# Altium PCB AT32.PcbDoc (part 6 of 9)
Units mm, origin at the board's own origin, x right, y up, seen from the top; angles counter-clockwise.
Board outline 152.1 x 84.6 mm, 2 copper layers (Top Layer, Bottom Layer); 49 components, 58 nets, 223 pads, 0 vias.
Unrouted connection lines stored in the file: 3.
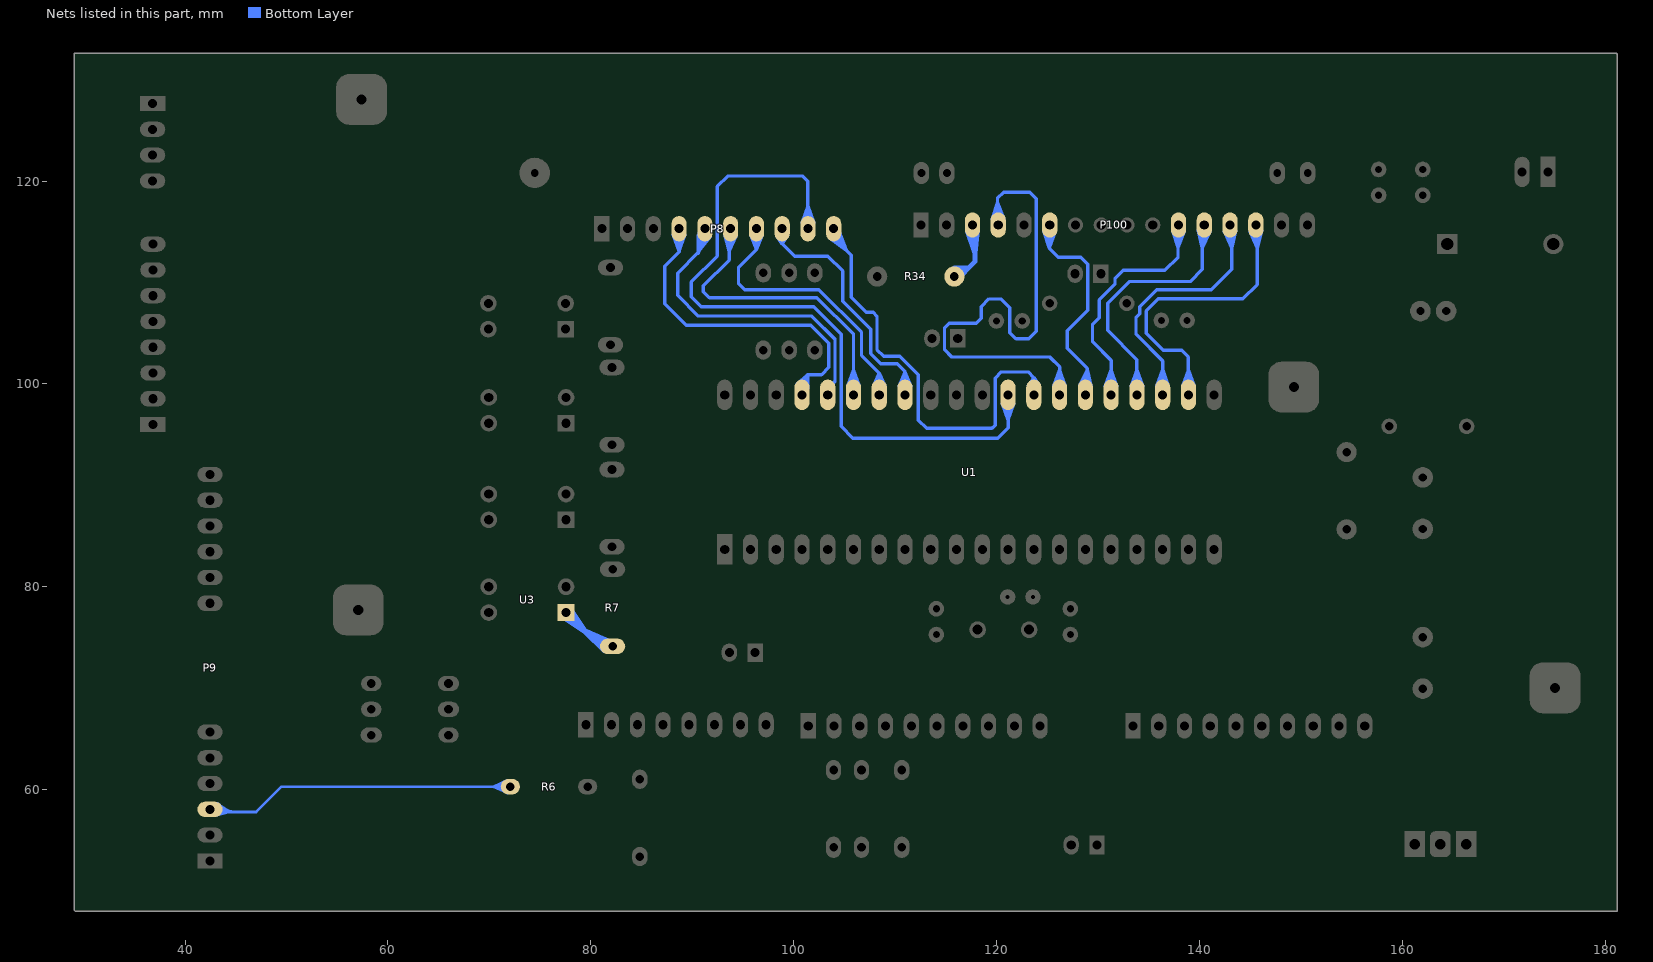
[diagram p6: the nets of this part, all layers, seen from the top]

## Nets (pads, with @x,y where several pads share a name; then routed paths per layer and width w, separated by ;. In a path a pad name is that pad's centre, name@x,y a point inside that pad or via, vN(x,y) a via of type N, cw(c..) or ccw(c..) an arc to the next point about the centre after c; other vN are vias at no path point) (continued)
NetP8_4: P8.4 U1.37 | length 145.6
  Bottom Layer w0.33: P8.4@88.297,114.396 cw(c87.299,113.398) 88.711,113.398 cw(c90.123,113.398) P8.4@89.125,114.396 ; P8.4@88.711,115.31 88.711,113.05 87.28,111.619 87.28,107.92 89.4,105.8 101.7,105.8 103.48,104.02 103.48,101.648 102.757,100.925 101.379,100.925 ; U1.37@100.826,98.927 100.826,100.372 101.379,100.925 ; U1.37@101.034,99.825 cw(c101.556,100.196) 101.103,100.649 ; U1.37@101.303,100.016 cw(c101.879,100.425) 101.379,100.925 ; P8.4@88.134,114.712 88.711,113.07 ; P8.4@88.134,114.712 88.711,113.07 ; P8.4@88.134,114.712 88.711,113.07 ; P8.4@88.134,114.712 88.711,113.07 ; P8.4@88.134,114.712 88.711,113.07 ; P8.4@88.134,114.712 88.711,113.07 ; P8.4@88.134,114.712 88.711,113.07 ; P8.4@88.457,114.791 88.711,113.07 ; P8.4@88.457,114.791 88.711,113.07 ; P8.4@88.457,114.791 88.711,113.07 ; P8.4@88.457,114.791 88.711,113.07 ; P8.4@88.457,114.791 88.711,113.07 ; P8.4@88.457,114.791 88.711,113.07 ; P8.4@88.457,114.791 88.711,113.07 ; 88.711,113.07 P8.4@89.288,114.712 ; 88.711,113.07 P8.4@88.965,114.791 ; 88.711,113.07 P8.4@88.711,114.81 ; 88.711,113.07 P8.4@89.288,114.712 ; 88.711,113.07 P8.4@88.965,114.791 ; 88.711,113.07 P8.4@88.711,114.81 ; 88.711,113.07 P8.4@89.288,114.712 ; 88.711,113.07 P8.4@88.965,114.791 ; 88.711,113.07 P8.4@88.711,114.81 ; 88.711,113.07 P8.4@89.288,114.712 ; 88.711,113.07 P8.4@88.965,114.791 ; 88.711,113.07 P8.4@88.711,114.81 ; 88.711,113.07 P8.4@89.288,114.712 ; 88.711,113.07 P8.4@88.965,114.791 ; 88.711,113.07 P8.4@88.711,114.81 ; 88.711,113.07 P8.4@89.288,114.712 ; 88.711,113.07 P8.4@88.965,114.791 ; 88.711,113.07 P8.4@88.711,114.81 ; 88.711,113.07 P8.4@89.288,114.712 ; 88.711,113.07 P8.4@88.965,114.791 ; 88.711,113.07 P8.4@88.711,114.81 ; U1.37@100.354,100.023 101.379,100.925 ; U1.37@100.354,100.023 101.379,100.925 ; U1.37@100.354,100.023 101.379,100.925 ; U1.37@100.354,100.023 101.379,100.925 ; U1.37@100.354,100.023 101.379,100.925 ; U1.37@100.354,100.023 101.379,100.925 ; U1.37@100.354,100.023 101.379,100.925 ; U1.37@100.604,99.802 101.379,100.925 ; U1.37@100.604,99.802 101.379,100.925 ; U1.37@100.604,99.802 101.379,100.925 ; U1.37@100.604,99.802 101.379,100.925 ; U1.37@100.604,99.802 101.379,100.925 ; U1.37@100.604,99.802 101.379,100.925 ; U1.37@100.604,99.802 101.379,100.925 ; U1.37@100.826,99.677 101.379,100.925 ; U1.37@100.826,99.677 101.379,100.925 ; U1.37@100.826,99.677 101.379,100.925 ; U1.37@100.826,99.677 101.379,100.925 ; U1.37@100.826,99.677 101.379,100.925 ; U1.37@100.826,99.677 101.379,100.925 ; U1.37@100.826,99.677 101.379,100.925 ; U1.37@101.068,99.596 101.379,100.925 ; U1.37@101.068,99.596 101.379,100.925 ; U1.37@101.068,99.596 101.379,100.925 ; U1.37@101.068,99.596 101.379,100.925 ; U1.37@101.068,99.596 101.379,100.925 ; U1.37@101.068,99.596 101.379,100.925 ; U1.37@101.068,99.596 101.379,100.925 ; 101.379,100.925 U1.37@101.399,99.56 ; 101.379,100.925 U1.37@101.399,99.56 ; 101.379,100.925 U1.37@101.399,99.56 ; 101.379,100.925 U1.37@101.399,99.56 ; 101.379,100.925 U1.37@101.399,99.56 ; 101.379,100.925 U1.37@101.399,99.56 ; 101.379,100.925 U1.37@101.399,99.56
NetP8_5: P8.5 U1.36 | length 102
  Bottom Layer w0.33: 90.6,112.868 cw(c92.159,112.868) P8.5@91.499,114.28 ; 90.6,113.386 cw(c91.917,113.386) P8.5@91.359,114.579 ; 90.6,113.905 cw(c91.674,113.905) P8.5@91.219,114.878 ; 90.6,114.423 cw(c91.432,114.423) P8.5@91.079,115.177 ; P8.5@90.676,114.916 90.628,113.053 ; P8.5@90.676,114.917 90.636,113.099 ; P8.5@90.677,114.921 90.623,113.104 ; P8.5@90.677,114.924 90.602,113.043 ; P8.5@91.251,115.31 90.6,114.659 90.6,112.98 88.56,110.94 88.56,108.74 90.6,106.7 101.8,106.7 104.081,104.419 104.081,100.265 103.366,99.55 U1.36@103.366,98.927 ; P8.5@91.484,114.705 90.623,113.104 ; P8.5@91.484,114.706 90.602,113.043 ; P8.5@91.485,114.709 90.628,113.053 ; P8.5@91.76,114.522 90.623,113.104 ; P8.5@91.762,114.525 90.602,113.043 ; P8.5@91.763,114.526 90.636,113.099 ; P8.5@91.765,114.531 90.628,113.053 ; 90.6,112.998 P8.5@91.765,114.531 ; 90.6,112.998 P8.5@90.677,114.922 ; 90.6,112.998 P8.5@91.485,114.708 ; 90.6,112.998 P8.5@91.006,114.88 ; 90.6,112.998 P8.5@91.251,114.81 ; 90.6,112.998 P8.5@91.765,114.531 ; 90.6,112.998 P8.5@90.677,114.922 ; 90.6,112.998 P8.5@91.485,114.708 ; 90.6,112.998 P8.5@91.006,114.88 ; 90.6,112.998 P8.5@91.251,114.81 ; 90.6,112.998 P8.5@91.765,114.531 ; 90.6,112.998 P8.5@90.677,114.922 ; 90.6,112.998 P8.5@91.485,114.708 ; 90.6,112.998 P8.5@91.006,114.88 ; 90.6,112.998 P8.5@91.251,114.81 ; 90.602,113.043 91.006,114.882 90.623,113.104 ; 90.602,113.043 P8.5@91.251,114.81 ; 90.623,113.104 P8.5@91.251,114.81 ; 90.628,113.053 91.005,114.879 90.636,113.099 ; 90.628,113.053 P8.5@91.251,114.81 ; 90.636,113.099 P8.5@91.484,114.707 ; 90.636,113.099 P8.5@91.251,114.81
NetP8_6: P8.6 U1.35 | length 157.3
  Bottom Layer w0.33: P8.6@93.377,114.396 cw(c92.743,113.762) 93.64,113.762 ; 93.64,113.033 cw(c95.568,113.033) P8.6@94.205,114.396 ; 93.64,113.83 cw(c94.771,113.83) P8.6@93.971,114.63 ; P8.6@93.791,115.31 93.64,115.159 93.64,112.22 91.1,109.68 91.1,109.1 91.7,108.5 102.3,108.5 105.906,104.894 U1.35@105.906,98.927 ; P8.6@94.357,114.663 93.64,113.072 ; U1.35@105.492,100.091 ccw(c104.494,101.089) 105.906,101.089 ccw(c107.318,101.089) U1.35@106.32,100.091 ; P8.6@93.208,114.762 93.64,113.066 ; P8.6@93.208,114.762 93.64,113.066 ; P8.6@93.208,114.762 93.64,113.066 ; P8.6@93.208,114.762 93.64,113.066 ; P8.6@93.208,114.762 93.64,113.066 ; P8.6@93.208,114.762 93.64,113.066 ; P8.6@93.208,114.762 93.64,113.072 ; P8.6@93.536,114.813 93.64,113.066 ; P8.6@93.536,114.813 93.64,113.066 ; P8.6@93.536,114.813 93.64,113.066 ; P8.6@93.536,114.813 93.64,113.066 ; P8.6@93.536,114.813 93.64,113.066 ; P8.6@93.536,114.813 93.64,113.066 ; P8.6@93.536,114.813 93.64,113.072 ; 93.64,113.066 P8.6@94.357,114.663 ; 93.64,113.066 P8.6@94.043,114.77 ; 93.64,113.066 P8.6@93.791,114.81 ; 93.64,113.066 P8.6@94.357,114.663 ; 93.64,113.066 P8.6@94.043,114.77 ; 93.64,113.066 P8.6@93.791,114.81 ; 93.64,113.066 P8.6@94.357,114.663 ; 93.64,113.066 P8.6@94.043,114.77 ; 93.64,113.066 P8.6@93.791,114.81 ; 93.64,113.066 P8.6@94.357,114.663 ; 93.64,113.066 P8.6@94.043,114.77 ; 93.64,113.066 P8.6@93.791,114.81 ; 93.64,113.066 P8.6@94.357,114.663 ; 93.64,113.066 P8.6@94.043,114.77 ; 93.64,113.066 P8.6@93.791,114.81 ; 93.64,113.066 P8.6@94.357,114.663 ; 93.64,113.066 P8.6@94.043,114.77 ; 93.64,113.066 P8.6@93.791,114.81 ; 93.64,113.072 P8.6@94.043,114.77 ; 93.64,113.072 P8.6@93.791,114.81 ; U1.35@105.329,99.775 105.906,101.417 ; U1.35@105.329,99.775 105.906,101.417 ; U1.35@105.329,99.775 105.906,101.417 ; U1.35@105.329,99.775 105.906,101.417 ; U1.35@105.329,99.775 105.906,101.417 ; U1.35@105.329,99.775 105.906,101.417 ; U1.35@105.329,99.775 105.906,101.417 ; U1.35@105.652,99.696 105.906,101.417 ; U1.35@105.652,99.696 105.906,101.417 ; U1.35@105.652,99.696 105.906,101.417 ; U1.35@105.652,99.696 105.906,101.417 ; U1.35@105.652,99.696 105.906,101.417 ; U1.35@105.652,99.696 105.906,101.417 ; U1.35@105.652,99.696 105.906,101.417 ; U1.35@105.906,99.677 105.906,101.417 ; U1.35@105.906,99.677 105.906,101.417 ; U1.35@105.906,99.677 105.906,101.417 ; U1.35@105.906,99.677 105.906,101.417 ; U1.35@105.906,99.677 105.906,101.417 ; U1.35@105.906,99.677 105.906,101.417 ; U1.35@105.906,99.677 105.906,101.417 ; 105.906,101.417 U1.35@106.483,99.775 ; 105.906,101.417 U1.35@106.16,99.696 ; 105.906,101.417 U1.35@106.483,99.775 ; 105.906,101.417 U1.35@106.16,99.696 ; 105.906,101.417 U1.35@106.483,99.775 ; 105.906,101.417 U1.35@106.16,99.696 ; 105.906,101.417 U1.35@106.483,99.775 ; 105.906,101.417 U1.35@106.16,99.696 ; 105.906,101.417 U1.35@106.483,99.775 ; 105.906,101.417 U1.35@106.16,99.696 ; 105.906,101.417 U1.35@106.483,99.775 ; 105.906,101.417 U1.35@106.16,99.696 ; 105.906,101.417 U1.35@106.483,99.775 ; 105.906,101.417 U1.35@106.16,99.696
NetP8_7: P8.7 U1.34 | length 134.9
  Bottom Layer w0.33: P8.7@95.917,114.396 cw(c94.919,113.398) 96.331,113.398 cw(c97.743,113.398) P8.7@96.745,114.396 ; P8.7@96.331,115.31 96.331,113.231 ; U1.34@108.04,100.098 ccw(c107.118,101.054) 108.446,101.054 ; U1.34@108.446,98.927 108.446,101.054 ; U1.34@108.852,100.098 cw(c109.774,101.054) 108.446,101.054 ; P8.7@95.756,114.702 96.331,113.231 ; P8.7@95.756,114.702 96.331,113.231 ; P8.7@95.756,114.702 96.331,113.231 ; P8.7@95.756,114.702 96.331,113.231 ; P8.7@95.756,114.702 96.331,113.231 ; P8.7@95.756,114.702 96.331,113.231 ; P8.7@95.756,114.702 96.331,113.231 ; P8.7@96.077,114.789 96.331,113.231 ; P8.7@96.077,114.789 96.331,113.231 ; P8.7@96.077,114.789 96.331,113.231 ; P8.7@96.077,114.789 96.331,113.231 ; P8.7@96.077,114.789 96.331,113.231 ; P8.7@96.077,114.789 96.331,113.231 ; P8.7@96.077,114.789 96.331,113.231 ; 96.331,113.231 94.56,111.46 94.56,109.94 95.2,109.3 102.48,109.3 106.7,105.08 106.7,102.8 108.446,101.054 ; 96.331,113.231 P8.7@96.906,114.702 ; 96.331,113.231 P8.7@96.585,114.789 ; 96.331,113.231 P8.7@96.331,114.81 ; 96.331,113.231 P8.7@96.906,114.702 ; 96.331,113.231 P8.7@96.585,114.789 ; 96.331,113.231 P8.7@96.331,114.81 ; 96.331,113.231 P8.7@96.906,114.702 ; 96.331,113.231 P8.7@96.585,114.789 ; 96.331,113.231 P8.7@96.331,114.81 ; 96.331,113.231 P8.7@96.906,114.702 ; 96.331,113.231 P8.7@96.585,114.789 ; 96.331,113.231 P8.7@96.331,114.81 ; 96.331,113.231 P8.7@96.906,114.702 ; 96.331,113.231 P8.7@96.585,114.789 ; 96.331,113.231 P8.7@96.331,114.81 ; 96.331,113.231 P8.7@96.906,114.702 ; 96.331,113.231 P8.7@96.585,114.789 ; 96.331,113.231 P8.7@96.331,114.81 ; 96.331,113.231 P8.7@96.906,114.702 ; 96.331,113.231 P8.7@96.585,114.789 ; 96.331,113.231 P8.7@96.331,114.81 ; U1.34@107.874,99.801 108.446,101.054 ; U1.34@107.874,99.801 108.446,101.054 ; U1.34@107.874,99.801 108.446,101.054 ; U1.34@107.874,99.801 108.446,101.054 ; U1.34@107.874,99.801 108.446,101.054 ; U1.34@107.874,99.801 108.446,101.054 ; U1.34@107.874,99.801 108.446,101.054 ; U1.34@108.192,99.701 108.446,101.054 ; U1.34@108.192,99.701 108.446,101.054 ; U1.34@108.192,99.701 108.446,101.054 ; U1.34@108.192,99.701 108.446,101.054 ; U1.34@108.192,99.701 108.446,101.054 ; U1.34@108.192,99.701 108.446,101.054 ; U1.34@108.192,99.701 108.446,101.054 ; U1.34@108.446,99.677 108.446,101.054 ; U1.34@108.446,99.677 108.446,101.054 ; U1.34@108.446,99.677 108.446,101.054 ; U1.34@108.446,99.677 108.446,101.054 ; U1.34@108.446,99.677 108.446,101.054 ; U1.34@108.446,99.677 108.446,101.054 ; U1.34@108.446,99.677 108.446,101.054 ; 108.446,101.054 U1.34@109.018,99.801 ; 108.446,101.054 U1.34@108.7,99.701 ; 108.446,101.054 U1.34@109.018,99.801 ; 108.446,101.054 U1.34@108.7,99.701 ; 108.446,101.054 U1.34@109.018,99.801 ; 108.446,101.054 U1.34@108.7,99.701 ; 108.446,101.054 U1.34@109.018,99.801 ; 108.446,101.054 U1.34@108.7,99.701 ; 108.446,101.054 U1.34@109.018,99.801 ; 108.446,101.054 U1.34@108.7,99.701 ; 108.446,101.054 U1.34@109.018,99.801 ; 108.446,101.054 U1.34@108.7,99.701 ; 108.446,101.054 U1.34@109.018,99.801 ; 108.446,101.054 U1.34@108.7,99.701
NetP8_8: P8.8 U1.33 | length 116.1
  Bottom Layer w0.33: P8.8@98.593,114.295 cw(c98.341,113.829) 98.871,113.829 ; P8.8@98.871,115.31 98.871,113.829 ; P8.8@99.149,114.295 ccw(c99.401,113.829) 98.871,113.829 ; U1.33@110.572,100.091 ccw(c109.574,101.089) 110.986,101.089 ccw(c112.398,101.089) U1.33@111.4,100.091 ; U1.33@110.986,98.927 110.986,101.225 ; P8.8@98.313,114.636 98.871,113.829 ; P8.8@98.313,114.636 98.871,113.829 ; P8.8@98.313,114.636 98.871,113.829 ; P8.8@98.313,114.636 98.871,113.829 ; P8.8@98.313,114.636 98.871,113.829 ; P8.8@98.313,114.636 98.871,113.829 ; P8.8@98.313,114.636 98.871,113.829 ; P8.8@98.618,114.777 98.871,113.829 ; P8.8@98.618,114.777 98.871,113.829 ; P8.8@98.618,114.777 98.871,113.829 ; P8.8@98.618,114.777 98.871,113.829 ; P8.8@98.618,114.777 98.871,113.829 ; P8.8@98.618,114.777 98.871,113.829 ; P8.8@98.618,114.777 98.871,113.829 ; 98.871,113.829 100.1,112.6 103.38,112.6 104.84,111.14 104.84,108.14 107.6,105.38 107.6,103 108.6,102 110.211,102 110.986,101.225 ; 98.871,113.829 P8.8@99.429,114.636 ; 98.871,113.829 P8.8@99.124,114.777 ; 98.871,113.829 P8.8@98.871,114.81 ; 98.871,113.829 P8.8@99.429,114.636 ; 98.871,113.829 P8.8@99.124,114.777 ; 98.871,113.829 P8.8@98.871,114.81 ; 98.871,113.829 P8.8@99.429,114.636 ; 98.871,113.829 P8.8@99.124,114.777 ; 98.871,113.829 P8.8@98.871,114.81 ; 98.871,113.829 P8.8@99.429,114.636 ; 98.871,113.829 P8.8@99.124,114.777 ; 98.871,113.829 P8.8@98.871,114.81 ; 98.871,113.829 P8.8@99.429,114.636 ; 98.871,113.829 P8.8@99.124,114.777 ; 98.871,113.829 P8.8@98.871,114.81 ; 98.871,113.829 P8.8@99.429,114.636 ; 98.871,113.829 P8.8@99.124,114.777 ; 98.871,113.829 P8.8@98.871,114.81 ; 98.871,113.829 P8.8@99.429,114.636 ; 98.871,113.829 P8.8@99.124,114.777 ; 98.871,113.829 P8.8@98.871,114.81 ; U1.33@110.412,99.788 110.986,101.225 ; U1.33@110.412,99.788 110.986,101.225 ; U1.33@110.412,99.788 110.986,101.225 ; U1.33@110.412,99.788 110.986,101.225 ; U1.33@110.412,99.788 110.986,101.225 ; U1.33@110.412,99.788 110.986,101.225 ; U1.33@110.412,99.788 110.986,101.225 ; U1.33@110.732,99.698 110.986,101.225 ; U1.33@110.732,99.698 110.986,101.225 ; U1.33@110.732,99.698 110.986,101.225 ; U1.33@110.732,99.698 110.986,101.225 ; U1.33@110.732,99.698 110.986,101.225 ; U1.33@110.732,99.698 110.986,101.225 ; U1.33@110.732,99.698 110.986,101.225 ; U1.33@110.986,99.677 110.986,101.225 ; U1.33@110.986,99.677 110.986,101.225 ; U1.33@110.986,99.677 110.986,101.225 ; U1.33@110.986,99.677 110.986,101.225 ; U1.33@110.986,99.677 110.986,101.225 ; U1.33@110.986,99.677 110.986,101.225 ; U1.33@110.986,99.677 110.986,101.225 ; 110.986,101.225 U1.33@111.56,99.788 ; 110.986,101.225 U1.33@111.24,99.698 ; 110.986,101.225 U1.33@111.56,99.788 ; 110.986,101.225 U1.33@111.24,99.698 ; 110.986,101.225 U1.33@111.56,99.788 ; 110.986,101.225 U1.33@111.24,99.698 ; 110.986,101.225 U1.33@111.56,99.788 ; 110.986,101.225 U1.33@111.24,99.698 ; 110.986,101.225 U1.33@111.56,99.788 ; 110.986,101.225 U1.33@111.24,99.698 ; 110.986,101.225 U1.33@111.56,99.788 ; 110.986,101.225 U1.33@111.24,99.698 ; 110.986,101.225 U1.33@111.56,99.788 ; 110.986,101.225 U1.33@111.24,99.698
NetP8_9: P8.9 U1.29 | length 198.4
  Bottom Layer w0.33: P8.9@100.997,116.224 ccw(c99.999,117.222) 101.411,117.222 ccw(c102.823,117.222) P8.9@101.825,116.224 ; P8.9@101.411,115.31 101.411,119.989 100.9,120.5 93.5,120.5 92.471,119.471 92.471,116.022 92.476,116.017 92.476,114.603 92.471,114.598 92.471,112.611 89.92,110.06 89.92,108.58 90.9,107.6 102,107.6 104.681,104.919 104.681,99.582 ; 104.686,99.582 104.686,95.814 105.84,94.66 120.12,94.66 121.146,95.686 U1.29@121.146,98.927 ; U1.29@120.732,97.763 cw(c119.734,96.765) 121.146,96.765 cw(c122.558,96.765) U1.29@121.56,97.763 ; P8.9@100.834,115.908 101.411,117.55 ; P8.9@100.834,115.908 101.411,117.55 ; P8.9@100.834,115.908 101.411,117.55 ; P8.9@100.834,115.908 101.411,117.55 ; P8.9@100.834,115.908 101.411,117.55 ; P8.9@100.834,115.908 101.411,117.55 ; P8.9@100.834,115.908 101.411,117.55 ; P8.9@101.157,115.829 101.411,117.55 ; P8.9@101.157,115.829 101.411,117.55 ; P8.9@101.157,115.829 101.411,117.55 ; P8.9@101.157,115.829 101.411,117.55 ; P8.9@101.157,115.829 101.411,117.55 ; P8.9@101.157,115.829 101.411,117.55 ; P8.9@101.157,115.829 101.411,117.55 ; P8.9@101.411,115.81 101.411,117.55 ; P8.9@101.411,115.81 101.411,117.55 ; P8.9@101.411,115.81 101.411,117.55 ; P8.9@101.411,115.81 101.411,117.55 ; P8.9@101.411,115.81 101.411,117.55 ; P8.9@101.411,115.81 101.411,117.55 ; P8.9@101.411,115.81 101.411,117.55 ; 101.411,117.55 P8.9@101.988,115.908 ; 101.411,117.55 P8.9@101.665,115.829 ; 101.411,117.55 P8.9@101.988,115.908 ; 101.411,117.55 P8.9@101.665,115.829 ; 101.411,117.55 P8.9@101.988,115.908 ; 101.411,117.55 P8.9@101.665,115.829 ; 101.411,117.55 P8.9@101.988,115.908 ; 101.411,117.55 P8.9@101.665,115.829 ; 101.411,117.55 P8.9@101.988,115.908 ; 101.411,117.55 P8.9@101.665,115.829 ; 101.411,117.55 P8.9@101.988,115.908 ; 101.411,117.55 P8.9@101.665,115.829 ; 101.411,117.55 P8.9@101.988,115.908 ; 101.411,117.55 P8.9@101.665,115.829 ; U1.29@120.569,98.079 121.146,96.437 ; U1.29@120.569,98.079 121.146,96.437 ; U1.29@120.569,98.079 121.146,96.437 ; U1.29@120.569,98.079 121.146,96.437 ; U1.29@120.569,98.079 121.146,96.437 ; U1.29@120.569,98.079 121.146,96.437 ; U1.29@120.569,98.079 121.146,96.437 ; U1.29@120.892,98.158 121.146,96.437 ; U1.29@120.892,98.158 121.146,96.437 ; U1.29@120.892,98.158 121.146,96.437 ; U1.29@120.892,98.158 121.146,96.437 ; U1.29@120.892,98.158 121.146,96.437 ; U1.29@120.892,98.158 121.146,96.437 ; U1.29@120.892,98.158 121.146,96.437 ; 121.146,96.437 U1.29@121.723,98.079 ; 121.146,96.437 U1.29@121.4,98.158 ; 121.146,96.437 U1.29@121.146,98.177 ; 121.146,96.437 U1.29@121.723,98.079 ; 121.146,96.437 U1.29@121.4,98.158 ; 121.146,96.437 U1.29@121.146,98.177 ; 121.146,96.437 U1.29@121.723,98.079 ; 121.146,96.437 U1.29@121.4,98.158 ; 121.146,96.437 U1.29@121.146,98.177 ; 121.146,96.437 U1.29@121.723,98.079 ; 121.146,96.437 U1.29@121.4,98.158 ; 121.146,96.437 U1.29@121.146,98.177 ; 121.146,96.437 U1.29@121.723,98.079 ; 121.146,96.437 U1.29@121.4,98.158 ; 121.146,96.437 U1.29@121.146,98.177 ; 121.146,96.437 U1.29@121.723,98.079 ; 121.146,96.437 U1.29@121.4,98.158 ; 121.146,96.437 U1.29@121.146,98.177 ; 121.146,96.437 U1.29@121.723,98.079 ; 121.146,96.437 U1.29@121.4,98.158 ; 121.146,96.437 U1.29@121.146,98.177
NetP8_10: P8.10 U1.28 | length 154.8
  Bottom Layer w0.33: P8.10@103.543,114.39 105.204,113.185 ; P8.10@103.543,114.391 105.194,113.192 ; P8.10@103.544,114.389 105.189,113.207 ; P8.10@103.951,114.225 cw(c103.951,113.733) 104.299,114.081 ; P8.10@103.951,115.31 103.951,114.429 105.68,112.7 105.68,108.54 107.16,107.06 107.858,107.06 108.218,106.7 108.218,103.397 108.884,102.731 110.469,102.731 ; P8.10@104.162,114.953 105.204,113.185 ; P8.10@104.206,114.81 ccw(c105.742,114.81) 104.656,113.724 ; P8.10@104.46,115.098 105.204,113.185 ; P8.10@104.536,114.81 ccw(c106.868,114.81) 105.219,113.161 ; 112.301,100.8 112.301,96.439 113.12,95.62 119.56,95.62 119.88,95.94 119.88,100.582 120.481,101.183 123.138,101.183 123.686,100.635 ; U1.28@123.419,100.197 ccw(c123.194,100.635) 123.686,100.635 ; U1.28@123.686,98.927 123.686,100.635 ; U1.28@123.953,100.197 cw(c124.178,100.635) 123.686,100.635 ; P8.10@103.542,114.392 105.21,113.17 ; P8.10@103.542,114.392 105.21,113.17 ; P8.10@103.542,114.392 105.21,113.17 ; P8.10@103.542,114.392 105.21,113.17 ; P8.10@103.759,114.643 105.21,113.17 ; P8.10@103.759,114.643 105.21,113.17 ; P8.10@103.759,114.643 105.21,113.17 ; P8.10@103.759,114.643 105.21,113.17 ; P8.10@103.759,114.642 105.194,113.192 ; P8.10@103.951,114.81 105.21,113.17 ; P8.10@103.951,114.81 105.204,113.185 ; P8.10@103.951,114.81 105.189,113.207 ; P8.10@103.951,114.81 105.21,113.17 ; P8.10@103.951,114.81 105.21,113.17 ; P8.10@103.951,114.81 105.21,113.17 ; P8.10@103.951,114.81 105.194,113.192 ; P8.10@104.162,114.953 105.21,113.17 ; P8.10@104.162,114.953 105.189,113.207 ; P8.10@104.162,114.953 105.21,113.17 ; P8.10@104.162,114.953 105.21,113.17 ; P8.10@104.162,114.953 105.21,113.17 ; P8.10@104.163,114.952 105.194,113.192 ; P8.10@104.461,115.097 105.21,113.17 ; P8.10@104.461,115.097 105.21,113.17 ; P8.10@104.461,115.097 105.21,113.17 ; P8.10@104.461,115.097 105.21,113.17 ; 105.189,113.207 104.461,115.097 105.194,113.192 ; 105.189,113.207 103.759,114.642 105.204,113.185 ; 110.469,102.731 112.3,100.9 110.469,102.731 ; U1.28@123.129,99.856 123.686,100.635 ; U1.28@123.129,99.856 123.686,100.635 ; U1.28@123.129,99.856 123.686,100.635 ; U1.28@123.129,99.856 123.686,100.635 ; U1.28@123.129,99.856 123.686,100.635 ; U1.28@123.129,99.856 123.686,100.635 ; U1.28@123.129,99.856 123.686,100.635 ; U1.28@123.433,99.711 123.686,100.635 ; U1.28@123.433,99.711 123.686,100.635 ; U1.28@123.433,99.711 123.686,100.635 ; U1.28@123.433,99.711 123.686,100.635 ; U1.28@123.433,99.711 123.686,100.635 ; U1.28@123.433,99.711 123.686,100.635 ; U1.28@123.433,99.711 123.686,100.635 ; U1.28@123.686,99.677 123.686,100.635 ; U1.28@123.686,99.677 123.686,100.635 ; U1.28@123.686,99.677 123.686,100.635 ; U1.28@123.686,99.677 123.686,100.635 ; U1.28@123.686,99.677 123.686,100.635 ; U1.28@123.686,99.677 123.686,100.635 ; U1.28@123.686,99.677 123.686,100.635 ; 123.686,100.635 U1.28@124.243,99.856 ; 123.686,100.635 U1.28@123.939,99.711 ; 123.686,100.635 U1.28@124.243,99.856 ; 123.686,100.635 U1.28@123.939,99.711 ; 123.686,100.635 U1.28@124.243,99.856 ; 123.686,100.635 U1.28@123.939,99.711 ; 123.686,100.635 U1.28@124.243,99.856 ; 123.686,100.635 U1.28@123.939,99.711 ; 123.686,100.635 U1.28@124.243,99.856 ; 123.686,100.635 U1.28@123.939,99.711 ; 123.686,100.635 U1.28@124.243,99.856 ; 123.686,100.635 U1.28@123.939,99.711 ; 123.686,100.635 U1.28@124.243,99.856 ; 123.686,100.635 U1.28@123.939,99.711
NetP9_3: P9.3 R6.1 | length 189.8
  Bottom Layer w0.254: P9.3@42.6,57.8 47,57.8 49.504,60.304 R6.1@72.074,60.304 ; P9.3@42.942,57.691 44.467,57.804 ; P9.3@42.983,57.437 44.467,57.804 ; P9.3@43.041,58.141 ccw(c43.865,58.965) 43.865,57.8 ; P9.3@43.065,58.414 44.467,57.804 ; P9.3@43.187,58.64 44.467,57.804 ; P9.3@43.221,58.321 ccw(c44.479,59.579) 44.479,57.8 ; P9.3@43.401,57.619 cw(c43.836,57.184) 43.836,57.8 ; P9.3@43.401,58.501 ccw(c45.092,60.192) 45.092,57.8 ; R6.1@71.439,59.849 ccw(c70.342,58.752) 70.342,60.304 ccw(c70.342,61.856) R6.1@71.439,60.759 ; R6.1@71.619,60.029 ccw(c70.955,59.365) 70.955,60.304 ccw(c70.955,61.243) R6.1@71.619,60.579 ; P9.3@42.942,57.691 44.488,57.8 ; P9.3@42.942,57.691 44.488,57.8 ; P9.3@42.942,57.691 44.488,57.8 ; P9.3@42.942,57.691 44.488,57.8 ; P9.3@42.942,57.691 44.488,57.8 ; P9.3@42.942,57.691 44.488,57.8 ; P9.3@42.96,58.06 44.488,57.8 ; P9.3@42.96,58.06 44.488,57.8 ; P9.3@42.96,58.06 44.488,57.8 ; P9.3@42.96,58.06 44.467,57.804 ; P9.3@42.96,58.06 44.488,57.8 ; P9.3@42.96,58.06 44.488,57.8 ; P9.3@42.96,58.06 44.488,57.8 ; P9.3@42.981,57.437 44.488,57.8 ; P9.3@42.981,57.437 44.488,57.8 ; P9.3@42.981,57.437 44.488,57.8 ; P9.3@42.981,57.437 44.488,57.8 ; P9.3@42.981,57.437 44.488,57.8 ; P9.3@42.981,57.437 44.488,57.8 ; P9.3@43.065,58.414 44.488,57.8 ; P9.3@43.065,58.414 44.488,57.8 ; P9.3@43.065,58.414 44.488,57.8 ; P9.3@43.065,58.414 44.488,57.8 ; P9.3@43.065,58.414 44.488,57.8 ; P9.3@43.065,58.414 44.488,57.8 ; P9.3@43.186,58.641 44.488,57.8 ; P9.3@43.186,58.641 44.488,57.8 ; P9.3@43.186,58.641 44.488,57.8 ; P9.3@43.186,58.641 44.488,57.8 ; P9.3@43.186,58.641 44.488,57.8 ; P9.3@43.186,58.641 44.488,57.8 ; 70.362,60.304 R6.1@71.759,59.675 ; 70.362,60.304 R6.1@71.759,60.933 ; 70.362,60.304 R6.1@71.845,59.918 ; 70.362,60.304 R6.1@71.845,60.69 ; 70.362,60.304 R6.1@71.888,60.169 ; 70.362,60.304 R6.1@71.888,60.439 ; 70.362,60.304 R6.1@71.894,60.304 ; 70.362,60.304 R6.1@71.759,59.675 ; 70.362,60.304 R6.1@71.759,60.933 ; 70.362,60.304 R6.1@71.845,59.918 ; 70.362,60.304 R6.1@71.845,60.69 ; 70.362,60.304 R6.1@71.888,60.169 ; 70.362,60.304 R6.1@71.888,60.439 ; 70.362,60.304 R6.1@71.894,60.304 ; 70.362,60.304 R6.1@71.759,59.675 ; 70.362,60.304 R6.1@71.759,60.933 ; 70.362,60.304 R6.1@71.845,59.918 ; 70.362,60.304 R6.1@71.845,60.69 ; 70.362,60.304 R6.1@71.888,60.169 ; 70.362,60.304 R6.1@71.888,60.439 ; 70.362,60.304 R6.1@71.894,60.304 ; 70.362,60.304 R6.1@71.759,59.675 ; 70.362,60.304 R6.1@71.759,60.933 ; 70.362,60.304 R6.1@71.845,59.918 ; 70.362,60.304 R6.1@71.845,60.69 ; 70.362,60.304 R6.1@71.888,60.169 ; 70.362,60.304 R6.1@71.888,60.439 ; 70.362,60.304 R6.1@71.894,60.304 ; 70.362,60.304 R6.1@71.759,59.675 ; 70.362,60.304 R6.1@71.759,60.933 ; 70.362,60.304 R6.1@71.845,59.918 ; 70.362,60.304 R6.1@71.845,60.69 ; 70.362,60.304 R6.1@71.888,60.169 ; 70.362,60.304 R6.1@71.888,60.439 ; 70.362,60.304 R6.1@71.894,60.304 ; 70.362,60.304 R6.1@71.759,59.675 ; 70.362,60.304 R6.1@71.759,60.933 ; 70.362,60.304 R6.1@71.845,59.918 ; 70.362,60.304 R6.1@71.845,60.69 ; 70.362,60.304 R6.1@71.888,60.169 ; 70.362,60.304 R6.1@71.888,60.439 ; 70.362,60.304 R6.1@71.894,60.304 ; 70.362,60.304 R6.1@71.759,59.675 ; 70.362,60.304 R6.1@71.759,60.933 ; 70.362,60.304 R6.1@71.845,59.918 ; 70.362,60.304 R6.1@71.845,60.69 ; 70.362,60.304 R6.1@71.888,60.169 ; 70.362,60.304 R6.1@71.888,60.439 ; 70.362,60.304 R6.1@71.894,60.304 ; 70.362,60.304 R6.1@71.759,59.675 ; 70.362,60.304 R6.1@71.759,60.933 ; 70.362,60.304 R6.1@71.845,59.918 ; 70.362,60.304 R6.1@71.845,60.69 ; 70.362,60.304 R6.1@71.888,60.169 ; 70.362,60.304 R6.1@71.888,60.439 ; 70.362,60.304 R6.1@71.894,60.304 ; 70.362,60.304 R6.1@71.759,59.675 ; 70.362,60.304 R6.1@71.759,60.933 ; 70.362,60.304 R6.1@71.845,59.918 ; 70.362,60.304 R6.1@71.845,60.69 ; 70.362,60.304 R6.1@71.888,60.169 ; 70.362,60.304 R6.1@71.888,60.439 ; 70.362,60.304 R6.1@71.894,60.304
NetP100_3: P100.3 R34.1 | length 79.6
  Bottom Layer w0.5: R34.1@115.305,110.635 cw(c116.139,110.576) R34.1@116.139,111.412 ; R34.1@115.804,110.6 cw(c116.676,110.538) 116.676,111.412 ; R34.1@116.303,110.564 cw(c117.212,110.501) 117.212,111.412 ; P100.3@117.278,114.822 cw(c115.778,113.322) 117.9,113.322 ; P100.3@117.5,115.8 117.9,115.4 117.9,112.1 117.212,111.412 ; P100.3@118.132,115.179 117.897,112.932 ; R34.1@115.421,110.72 R34.1@115.854,111.412 ; R34.1@115.421,110.72 R34.1@115.854,111.412 ; R34.1@115.421,110.72 R34.1@115.854,111.412 ; R34.1@115.421,110.72 R34.1@115.854,111.412 ; R34.1@115.421,110.72 R34.1@115.854,111.412 ; R34.1@115.679,111.011 117.212,111.412 ; R34.1@115.679,111.011 117.212,111.412 ; R34.1@115.679,111.011 117.212,111.412 ; R34.1@115.679,111.011 117.212,111.412 ; R34.1@115.679,111.011 117.212,111.412 ; R34.1@115.854,110.596 117.212,111.412 ; R34.1@115.854,110.596 R34.1@115.854,111.412 ; R34.1@115.854,110.596 R34.1@115.854,111.412 ; R34.1@115.854,110.596 R34.1@115.854,111.412 ; R34.1@115.854,110.596 117.212,111.412 ; R34.1@115.854,110.596 R34.1@115.854,111.412 ; R34.1@115.854,110.596 117.212,111.412 ; R34.1@115.854,110.596 117.212,111.412 ; R34.1@115.854,111.412 117.212,111.412 ; R34.1@115.854,111.412 R34.1@116.287,110.72 ; R34.1@115.854,111.412 R34.1@116.287,110.72 ; R34.1@115.854,111.412 R34.1@116.287,110.72 ; R34.1@115.854,111.412 R34.1@116.287,110.72 ; R34.1@115.854,111.412 R34.1@116.287,110.72 ; R34.1@116.138,110.247 117.212,111.412 ; R34.1@116.138,110.247 117.212,111.412 ; R34.1@116.138,110.247 117.212,111.412 ; R34.1@116.138,110.247 117.212,111.412 ; R34.1@116.138,110.247 117.212,111.412 ; P100.3@117.145,115.063 117.9,112.911 ; P100.3@117.145,115.063 117.9,112.911 ; P100.3@117.145,115.063 117.9,112.911 ; P100.3@117.145,115.063 117.897,112.932 ; P100.3@117.145,115.063 117.9,112.911 ; P100.3@117.632,115.176 117.9,112.911 ; P100.3@117.632,115.176 117.9,112.911 ; P100.3@117.632,115.176 117.9,112.911 ; P100.3@117.632,115.176 117.897,112.932 ; P100.3@117.632,115.176 117.9,112.911 ; 117.9,112.911 P100.3@118.132,115.18 ; 117.9,112.911 P100.3@118.132,115.18 ; 117.9,112.911 P100.3@118.132,115.18 ; 117.9,112.911 P100.3@118.132,115.18
NetP100_4: P100.4 U1.27 | length 178.2
  Bottom Layer w0.33: P100.4@119.758,116.59 ccw(c118.934,117.414) 120.1,117.414 ; 120.1,116.965 ccw(c120.961,116.965) P100.4@120.352,116.356 ; 120.1,117.762 ccw(c121.758,117.762) P100.4@120.586,116.59 ; P100.4@120.3,115.8 120.1,116 120.1,118.3 120.7,118.9 123.3,118.9 123.925,118.275 123.925,105.185 123.2,104.46 121.92,104.46 121.32,105.06 121.32,107.5 120.44,108.38 119.258,108.38 118.505,107.627 118.505,106.485 118.02,106 115.322,106 114.88,105.558 114.88,103.365 115.586,102.659 125.241,102.659 126.226,101.675 U1.27@126.226,98.927 ; U1.27@125.812,100.091 ccw(c124.814,101.089) 126.226,101.089 ccw(c127.638,101.089) U1.27@126.64,100.091 ; P100.4@119.592,116.25 120.1,117.917 ; P100.4@119.592,116.25 120.1,117.917 ; P100.4@119.592,116.25 120.1,117.917 ; P100.4@119.592,116.25 120.1,117.917 ; P100.4@119.592,116.25 120.1,117.917 ; P100.4@119.592,116.25 120.1,117.917 ; P100.4@119.592,116.25 120.1,117.916 ; P100.4@119.917,116.184 120.1,117.917 ; P100.4@119.917,116.184 120.1,117.917 ; P100.4@119.917,116.184 120.1,117.917 ; P100.4@119.917,116.184 120.1,117.917 ; P100.4@119.917,116.184 120.1,117.917 ; P100.4@119.917,116.184 120.1,117.917 ; P100.4@119.917,116.184 120.1,117.916 ; 120.1,117.916 P100.4@120.744,116.298 ; 120.1,117.916 P100.4@120.425,116.205 ; 120.1,117.916 P100.4@120.172,116.176 ; 120.1,117.917 P100.4@120.744,116.298 ; 120.1,117.917 P100.4@120.425,116.205 ; 120.1,117.917 P100.4@120.172,116.176 ; 120.1,117.917 P100.4@120.744,116.298 ; 120.1,117.917 P100.4@120.425,116.205 ; 120.1,117.917 P100.4@120.172,116.176 ; 120.1,117.917 P100.4@120.744,116.298 ; 120.1,117.917 P100.4@120.425,116.205 ; 120.1,117.917 P100.4@120.172,116.176 ; 120.1,117.917 P100.4@120.744,116.298 ; 120.1,117.917 P100.4@120.425,116.205 ; 120.1,117.917 P100.4@120.172,116.176 ; 120.1,117.917 P100.4@120.744,116.298 ; 120.1,117.917 P100.4@120.425,116.205 ; 120.1,117.917 P100.4@120.172,116.176 ; 120.1,117.917 P100.4@120.744,116.298 ; 120.1,117.917 P100.4@120.425,116.205 ; 120.1,117.917 P100.4@120.172,116.176 ; U1.27@125.649,99.775 126.226,101.417 ; U1.27@125.649,99.775 126.226,101.417 ; U1.27@125.649,99.775 126.226,101.417 ; U1.27@125.649,99.775 126.226,101.417 ; U1.27@125.649,99.775 126.226,101.417 ; U1.27@125.649,99.775 126.226,101.417 ; U1.27@125.649,99.775 126.226,101.417 ; U1.27@125.972,99.696 126.226,101.417 ; U1.27@125.972,99.696 126.226,101.417 ; U1.27@125.972,99.696 126.226,101.417 ; U1.27@125.972,99.696 126.226,101.417 ; U1.27@125.972,99.696 126.226,101.417 ; U1.27@125.972,99.696 126.226,101.417 ; U1.27@125.972,99.696 126.226,101.417 ; U1.27@126.226,99.677 126.226,101.417 ; U1.27@126.226,99.677 126.226,101.417 ; U1.27@126.226,99.677 126.226,101.417 ; U1.27@126.226,99.677 126.226,101.417 ; U1.27@126.226,99.677 126.226,101.417 ; U1.27@126.226,99.677 126.226,101.417 ; U1.27@126.226,99.677 126.226,101.417 ; 126.226,101.417 U1.27@126.803,99.775 ; 126.226,101.417 U1.27@126.48,99.696 ; 126.226,101.417 U1.27@126.803,99.775 ; 126.226,101.417 U1.27@126.48,99.696 ; 126.226,101.417 U1.27@126.803,99.775 ; 126.226,101.417 U1.27@126.48,99.696 ; 126.226,101.417 U1.27@126.803,99.775 ; 126.226,101.417 U1.27@126.48,99.696 ; 126.226,101.417 U1.27@126.803,99.775 ; 126.226,101.417 U1.27@126.48,99.696 ; 126.226,101.417 U1.27@126.803,99.775 ; 126.226,101.417 U1.27@126.48,99.696 ; 126.226,101.417 U1.27@126.803,99.775 ; 126.226,101.417 U1.27@126.48,99.696
NetP100_6: P100.6 U1.26 | length 149.3
  Bottom Layer w0.33: P100.6@124.838,114.762 cw(c123.965,113.889) 125.2,113.889 ; 125.2,113.638 cw(c126.79,113.638) P100.6@125.666,114.762 ; P100.6@125.2,115.8 125.2,113.4 126.1,112.5 128.3,112.5 129,111.8 129,107.26 126.97,105.23 126.97,103.526 128.964,101.532 ; U1.26@128.358,100.096 ccw(c126.962,101.532) 128.964,101.532 ; U1.26@128.588,99.86 ccw(c127.722,100.75) 128.964,100.75 ; U1.26@128.766,98.927 128.964,98.927 128.964,101.532 ; 128.964,100.611 ccw(c129.7,100.611) U1.26@129.18,100.091 ; P100.6@124.673,115.095 125.2,113.436 ; P100.6@124.673,115.095 125.2,113.436 ; P100.6@124.673,115.095 125.2,113.436 ; P100.6@124.673,115.095 125.2,113.436 ; P100.6@124.673,115.095 125.2,113.436 ; P100.6@124.673,115.095 125.2,113.436 ; P100.6@124.673,115.095 125.2,113.436 ; P100.6@124.997,115.165 125.2,113.436 ; P100.6@124.997,115.165 125.2,113.436 ; P100.6@124.997,115.165 125.2,113.436 ; P100.6@124.997,115.165 125.2,113.436 ; P100.6@124.997,115.165 125.2,113.436 ; P100.6@124.997,115.165 125.2,113.436 ; P100.6@124.997,115.165 125.2,113.436 ; 125.2,113.436 P100.6@125.825,115.061 ; 125.2,113.436 P100.6@125.506,115.15 ; 125.2,113.436 P100.6@125.252,115.176 ; 125.2,113.436 P100.6@125.825,115.061 ; 125.2,113.436 P100.6@125.506,115.15 ; 125.2,113.436 P100.6@125.252,115.176 ; 125.2,113.436 P100.6@125.825,115.061 ; 125.2,113.436 P100.6@125.506,115.15 ; 125.2,113.436 P100.6@125.252,115.176 ; 125.2,113.436 P100.6@125.825,115.061 ; 125.2,113.436 P100.6@125.506,115.15 ; 125.2,113.436 P100.6@125.252,115.176 ; 125.2,113.436 P100.6@125.825,115.061 ; 125.2,113.436 P100.6@125.506,115.15 ; 125.2,113.436 P100.6@125.252,115.176 ; 125.2,113.436 P100.6@125.825,115.061 ; 125.2,113.436 P100.6@125.506,115.15 ; 125.2,113.436 P100.6@125.252,115.176 ; 125.2,113.436 P100.6@125.825,115.061 ; 125.2,113.436 P100.6@125.506,115.15 ; 125.2,113.436 P100.6@125.252,115.176 ; U1.26@128.204,99.839 128.964,101.419 ; U1.26@128.204,99.839 128.964,101.419 ; U1.26@128.204,99.839 128.964,101.419 ; U1.26@128.204,99.839 128.964,101.419 ; U1.26@128.204,99.839 128.964,101.419 ; U1.26@128.204,99.839 128.964,101.415 ; U1.26@128.204,99.839 128.964,101.419 ; U1.26@128.515,99.724 128.964,101.419 ; U1.26@128.515,99.724 128.964,101.419 ; U1.26@128.515,99.724 128.964,101.419 ; U1.26@128.515,99.724 128.964,101.419 ; U1.26@128.515,99.724 128.964,101.419 ; U1.26@128.515,99.724 128.964,101.415 ; U1.26@128.515,99.724 128.964,101.419 ; U1.26@128.766,99.677 128.964,101.419 ; U1.26@128.766,99.677 128.964,101.419 ; U1.26@128.766,99.677 128.964,101.419 ; U1.26@128.766,99.677 128.964,101.419 ; U1.26@128.766,99.677 128.964,101.419 ; U1.26@128.766,99.677 128.964,101.415 ; U1.26@128.766,99.677 128.964,101.419 ; 128.964,101.415 U1.26@129.35,99.709 ; 128.964,101.415 U1.26@129.021,99.667 ; 128.964,101.419 U1.26@129.35,99.709 ; 128.964,101.419 U1.26@129.021,99.667 ; 128.964,101.419 U1.26@129.35,99.709 ; 128.964,101.419 U1.26@129.021,99.667 ; 128.964,101.419 U1.26@129.35,99.709 ; 128.964,101.419 U1.26@129.021,99.667 ; 128.964,101.419 U1.26@129.35,99.709 ; 128.964,101.419 U1.26@129.021,99.667 ; 128.964,101.419 U1.26@129.35,99.709 ; 128.964,101.419 U1.26@129.021,99.667 ; 128.964,101.419 U1.26@129.35,99.709 ; 128.964,101.419 U1.26@129.021,99.667
NetP100_11: P100.11 U1.25 | length 149.7
  Bottom Layer w0.33: U1.25@130.892,100.091 ccw(c129.894,101.089) 131.306,101.089 ccw(c132.718,101.089) U1.25@131.72,100.091 ; U1.25@131.306,98.927 131.306,102.314 129.472,104.148 129.472,105.897 130.12,106.545 130.12,108.279 131.68,109.839 131.68,110.38 132.5,111.2 136.6,111.2 137.9,112.5 P100.11@137.9,115.7 ; P100.11@137.538,114.762 cw(c136.665,113.889) 137.9,113.889 ; 137.9,113.638 cw(c139.49,113.638) P100.11@138.366,114.762 ; U1.25@130.729,99.775 131.306,101.417 ; U1.25@130.729,99.775 131.306,101.417 ; U1.25@130.729,99.775 131.306,101.417 ; U1.25@130.729,99.775 131.306,101.417 ; U1.25@130.729,99.775 131.306,101.417 ; U1.25@130.729,99.775 131.306,101.417 ; U1.25@130.729,99.775 131.306,101.417 ; U1.25@131.052,99.696 131.306,101.417 ; U1.25@131.052,99.696 131.306,101.417 ; U1.25@131.052,99.696 131.306,101.417 ; U1.25@131.052,99.696 131.306,101.417 ; U1.25@131.052,99.696 131.306,101.417 ; U1.25@131.052,99.696 131.306,101.417 ; U1.25@131.052,99.696 131.306,101.417 ; U1.25@131.306,99.677 131.306,101.417 ; U1.25@131.306,99.677 131.306,101.417 ; U1.25@131.306,99.677 131.306,101.417 ; U1.25@131.306,99.677 131.306,101.417 ; U1.25@131.306,99.677 131.306,101.417 ; U1.25@131.306,99.677 131.306,101.417 ; U1.25@131.306,99.677 131.306,101.417 ; 131.306,101.417 U1.25@131.883,99.775 ; 131.306,101.417 U1.25@131.56,99.696 ; 131.306,101.417 U1.25@131.883,99.775 ; 131.306,101.417 U1.25@131.56,99.696 ; 131.306,101.417 U1.25@131.883,99.775 ; 131.306,101.417 U1.25@131.56,99.696 ; 131.306,101.417 U1.25@131.883,99.775 ; 131.306,101.417 U1.25@131.56,99.696 ; 131.306,101.417 U1.25@131.883,99.775 ; 131.306,101.417 U1.25@131.56,99.696 ; 131.306,101.417 U1.25@131.883,99.775 ; 131.306,101.417 U1.25@131.56,99.696 ; 131.306,101.417 U1.25@131.883,99.775 ; 131.306,101.417 U1.25@131.56,99.696 ; P100.11@137.373,115.095 137.9,113.436 ; P100.11@137.373,115.095 137.9,113.436 ; P100.11@137.373,115.095 137.9,113.436 ; P100.11@137.373,115.095 137.9,113.436 ; P100.11@137.373,115.095 137.9,113.436 ; P100.11@137.373,115.095 137.9,113.436 ; P100.11@137.373,115.095 137.9,113.436 ; P100.11@137.697,115.165 137.9,113.436 ; P100.11@137.697,115.165 137.9,113.436 ; P100.11@137.697,115.165 137.9,113.436 ; P100.11@137.697,115.165 137.9,113.436 ; P100.11@137.697,115.165 137.9,113.436 ; P100.11@137.697,115.165 137.9,113.436 ; P100.11@137.697,115.165 137.9,113.436 ; 137.9,113.436 P100.11@138.525,115.061 ; 137.9,113.436 P100.11@138.206,115.15 ; 137.9,113.436 P100.11@137.952,115.176 ; 137.9,113.436 P100.11@138.525,115.061 ; 137.9,113.436 P100.11@138.206,115.15 ; 137.9,113.436 P100.11@137.952,115.176 ; 137.9,113.436 P100.11@138.525,115.061 ; 137.9,113.436 P100.11@138.206,115.15 ; 137.9,113.436 P100.11@137.952,115.176 ; 137.9,113.436 P100.11@138.525,115.061 ; 137.9,113.436 P100.11@138.206,115.15 ; 137.9,113.436 P100.11@137.952,115.176 ; 137.9,113.436 P100.11@138.525,115.061 ; 137.9,113.436 P100.11@138.206,115.15 ; 137.9,113.436 P100.11@137.952,115.176 ; 137.9,113.436 P100.11@138.525,115.061 ; 137.9,113.436 P100.11@138.206,115.15 ; 137.9,113.436 P100.11@137.952,115.176 ; 137.9,113.436 P100.11@138.525,115.061 ; 137.9,113.436 P100.11@138.206,115.15 ; 137.9,113.436 P100.11@137.952,115.176
NetP100_12: P100.12 U1.24 | length 153.5
  Bottom Layer w0.33: U1.24@133.432,100.091 ccw(c132.434,101.089) 133.846,101.089 ccw(c135.258,101.089) U1.24@134.26,100.091 ; U1.24@133.846,98.927 133.846,102.406 130.96,105.292 130.96,107.98 133.08,110.1 139.1,110.1 140.3,111.3 140.3,115.7 P100.12@140.5,115.9 ; P100.12@140.078,114.762 cw(c139.543,114.227) 140.3,114.227 ; 140.3,113.3 cw(c142.368,113.3) P100.12@140.906,114.762 ; 140.3,114.097 cw(c141.571,114.097) P100.12@140.672,114.996 ; U1.24@133.269,99.775 133.846,101.417 ; U1.24@133.269,99.775 133.846,101.417 ; U1.24@133.269,99.775 133.846,101.417 ; U1.24@133.269,99.775 133.846,101.417 ; U1.24@133.269,99.775 133.846,101.417 ; U1.24@133.269,99.775 133.846,101.417 ; U1.24@133.269,99.775 133.846,101.417 ; U1.24@133.592,99.696 133.846,101.417 ; U1.24@133.592,99.696 133.846,101.417 ; U1.24@133.592,99.696 133.846,101.417 ; U1.24@133.592,99.696 133.846,101.417 ; U1.24@133.592,99.696 133.846,101.417 ; U1.24@133.592,99.696 133.846,101.417 ; U1.24@133.592,99.696 133.846,101.417 ; U1.24@133.846,99.677 133.846,101.417 ; U1.24@133.846,99.677 133.846,101.417 ; U1.24@133.846,99.677 133.846,101.417 ; U1.24@133.846,99.677 133.846,101.417 ; U1.24@133.846,99.677 133.846,101.417 ; U1.24@133.846,99.677 133.846,101.417 ; U1.24@133.846,99.677 133.846,101.417 ; 133.846,101.417 U1.24@134.423,99.775 ; 133.846,101.417 U1.24@134.1,99.696 ; 133.846,101.417 U1.24@134.423,99.775 ; 133.846,101.417 U1.24@134.1,99.696 ; 133.846,101.417 U1.24@134.423,99.775 ; 133.846,101.417 U1.24@134.1,99.696 ; 133.846,101.417 U1.24@134.423,99.775 ; 133.846,101.417 U1.24@134.1,99.696 ; 133.846,101.417 U1.24@134.423,99.775 ; 133.846,101.417 U1.24@134.1,99.696 ; 133.846,101.417 U1.24@134.423,99.775 ; 133.846,101.417 U1.24@134.1,99.696 ; 133.846,101.417 U1.24@134.423,99.775 ; 133.846,101.417 U1.24@134.1,99.696 ; P100.12@139.908,115.142 140.3,113.429 ; P100.12@139.908,115.142 140.3,113.429 ; P100.12@139.908,115.142 140.3,113.429 ; P100.12@139.908,115.142 140.3,113.429 ; P100.12@139.908,115.142 140.3,113.429 ; P100.12@139.908,115.142 140.3,113.429 ; P100.12@139.908,115.142 140.301,113.439 ; P100.12@140.237,115.185 140.3,113.429 ; P100.12@140.237,115.185 140.3,113.429 ; P100.12@140.237,115.185 140.3,113.429 ; P100.12@140.237,115.185 140.3,113.429 ; P100.12@140.237,115.185 140.3,113.429 ; P100.12@140.237,115.185 140.3,113.429 ; P100.12@140.237,115.185 140.301,113.439 ; 140.3,113.429 P100.12@141.055,115.016 ; 140.3,113.429 P100.12@140.743,115.13 ; 140.3,113.429 P100.12@140.492,115.176 ; 140.3,113.429 P100.12@141.055,115.016 ; 140.3,113.429 P100.12@140.743,115.13 ; 140.3,113.429 P100.12@140.492,115.176 ; 140.3,113.429 P100.12@141.055,115.016 ; 140.3,113.429 P100.12@140.743,115.13 ; 140.3,113.429 P100.12@140.492,115.176 ; 140.3,113.429 P100.12@141.055,115.016 ; 140.3,113.429 P100.12@140.743,115.13 ; 140.3,113.429 P100.12@140.492,115.176 ; 140.3,113.429 P100.12@141.055,115.016 ; 140.3,113.429 P100.12@140.743,115.13 ; 140.3,113.429 P100.12@140.492,115.176 ; 140.3,113.429 P100.12@141.055,115.016 ; 140.3,113.429 P100.12@140.743,115.13 ; 140.3,113.429 P100.12@140.492,115.176 ; 140.301,113.439 P100.12@141.055,115.016 ; 140.301,113.439 P100.12@140.743,115.13 ; 140.301,113.439 P100.12@140.492,115.176
NetP100_13: P100.13 U1.23 | length 152.6
  Bottom Layer w0.33: U1.23@135.972,100.091 ccw(c134.974,101.089) 136.386,101.089 ccw(c137.798,101.089) U1.23@136.8,100.091 ; U1.23@136.386,98.927 136.386,102.265 133.765,104.886 133.765,106.565 134.13,106.93 134.13,107.63 135.8,109.3 141.2,109.3 143.2,111.3 143.2,115.3 P100.13@142.9,115.6 ; P100.13@142.618,114.762 cw(c141.214,113.358) 143.2,113.358 ; P100.13@142.852,114.996 cw(c142.011,114.155) 143.2,114.155 ; 143.2,114.169 cw(c144.039,114.169) P100.13@143.446,114.762 ; P100.13@143.615,115.134 143.199,113.438 ; U1.23@135.809,99.775 136.386,101.417 ; U1.23@135.809,99.775 136.386,101.417 ; U1.23@135.809,99.775 136.386,101.417 ; U1.23@135.809,99.775 136.386,101.417 ; U1.23@135.809,99.775 136.386,101.417 ; U1.23@135.809,99.775 136.386,101.417 ; U1.23@135.809,99.775 136.386,101.417 ; U1.23@136.132,99.696 136.386,101.417 ; U1.23@136.132,99.696 136.386,101.417 ; U1.23@136.132,99.696 136.386,101.417 ; U1.23@136.132,99.696 136.386,101.417 ; U1.23@136.132,99.696 136.386,101.417 ; U1.23@136.132,99.696 136.386,101.417 ; U1.23@136.132,99.696 136.386,101.417 ; U1.23@136.386,99.677 136.386,101.417 ; U1.23@136.386,99.677 136.386,101.417 ; U1.23@136.386,99.677 136.386,101.417 ; U1.23@136.386,99.677 136.386,101.417 ; U1.23@136.386,99.677 136.386,101.417 ; U1.23@136.386,99.677 136.386,101.417 ; U1.23@136.386,99.677 136.386,101.417 ; 136.386,101.417 U1.23@136.963,99.775 ; 136.386,101.417 U1.23@136.64,99.696 ; 136.386,101.417 U1.23@136.963,99.775 ; 136.386,101.417 U1.23@136.64,99.696 ; 136.386,101.417 U1.23@136.963,99.775 ; 136.386,101.417 U1.23@136.64,99.696 ; 136.386,101.417 U1.23@136.963,99.775 ; 136.386,101.417 U1.23@136.64,99.696 ; 136.386,101.417 U1.23@136.963,99.775 ; 136.386,101.417 U1.23@136.64,99.696 ; 136.386,101.417 U1.23@136.963,99.775 ; 136.386,101.417 U1.23@136.64,99.696 ; 136.386,101.417 U1.23@136.963,99.775 ; 136.386,101.417 U1.23@136.64,99.696 ; P100.13@142.467,115.024 143.2,113.428 ; P100.13@142.467,115.024 143.2,113.428 ; P100.13@142.467,115.024 143.2,113.428 ; P100.13@142.467,115.024 143.2,113.428 ; P100.13@142.467,115.023 143.199,113.438 ; P100.13@142.467,115.024 143.2,113.428 ; P100.13@142.467,115.024 143.2,113.428 ; P100.13@142.781,115.133 143.2,113.428 ; P100.13@142.781,115.133 143.2,113.428 ; P100.13@142.781,115.133 143.2,113.428 ; P100.13@142.781,115.133 143.2,113.428 ; P100.13@142.781,115.133 143.199,113.438 ; P100.13@142.781,115.133 143.2,113.428 ; P100.13@142.781,115.133 143.2,113.428 ; P100.13@143.032,115.176 143.2,113.428 ; P100.13@143.032,115.176 143.2,113.428 ; P100.13@143.032,115.176 143.2,113.428 ; P100.13@143.032,115.176 143.2,113.428 ; P100.13@143.032,115.176 143.199,113.438 ; P100.13@143.032,115.176 143.2,113.428 ; P100.13@143.032,115.176 143.2,113.428 ; 143.199,113.438 P100.13@143.287,115.182 ; 143.2,113.428 P100.13@143.616,115.134 ; 143.2,113.428 P100.13@143.287,115.182 ; 143.2,113.428 P100.13@143.616,115.134 ; 143.2,113.428 P100.13@143.287,115.182 ; 143.2,113.428 P100.13@143.616,115.134 ; 143.2,113.428 P100.13@143.287,115.182 ; 143.2,113.428 P100.13@143.616,115.134 ; 143.2,113.428 P100.13@143.287,115.182 ; 143.2,113.428 P100.13@143.616,115.134 ; 143.2,113.428 P100.13@143.287,115.182 ; 143.2,113.428 P100.13@143.616,115.134 ; 143.2,113.428 P100.13@143.287,115.182
NetP100_14: P100.14 U1.22 | length 156.3
  Bottom Layer w0.33: U1.22@138.512,100.091 ccw(c137.514,101.089) 138.926,101.089 ccw(c140.338,101.089) U1.22@139.34,100.091 ; U1.22@138.926,98.927 138.926,102.665 138.279,103.311 136.447,103.311 134.76,104.998 134.76,107.194 134.762,107.196 135.966,108.4 144.3,108.4 145.7,109.8 145.7,115.3 P100.14@145.5,115.5 ; P100.14@145.004,115.036 145.699,113.437 ; P100.14@145.158,114.762 cw(c143.851,113.455) 145.7,113.455 ; P100.14@145.32,115.139 145.699,113.437 ; P100.14@145.392,114.996 cw(c144.647,114.251) 145.7,114.251 ; 145.7,114.073 cw(c146.675,114.073) P100.14@145.986,114.762 ; U1.22@138.349,99.775 138.926,101.417 ; U1.22@138.349,99.775 138.926,101.417 ; U1.22@138.349,99.775 138.926,101.417 ; U1.22@138.349,99.775 138.926,101.417 ; U1.22@138.349,99.775 138.926,101.417 ; U1.22@138.349,99.775 138.926,101.417 ; U1.22@138.349,99.775 138.926,101.417 ; U1.22@138.672,99.696 138.926,101.417 ; U1.22@138.672,99.696 138.926,101.417 ; U1.22@138.672,99.696 138.926,101.417 ; U1.22@138.672,99.696 138.926,101.417 ; U1.22@138.672,99.696 138.926,101.417 ; U1.22@138.672,99.696 138.926,101.417 ; U1.22@138.672,99.696 138.926,101.417 ; U1.22@138.926,99.677 138.926,101.417 ; U1.22@138.926,99.677 138.926,101.417 ; U1.22@138.926,99.677 138.926,101.417 ; U1.22@138.926,99.677 138.926,101.417 ; U1.22@138.926,99.677 138.926,101.417 ; U1.22@138.926,99.677 138.926,101.417 ; U1.22@138.926,99.677 138.926,101.417 ; 138.926,101.417 U1.22@139.503,99.775 ; 138.926,101.417 U1.22@139.18,99.696 ; 138.926,101.417 U1.22@139.503,99.775 ; 138.926,101.417 U1.22@139.18,99.696 ; 138.926,101.417 U1.22@139.503,99.775 ; 138.926,101.417 U1.22@139.18,99.696 ; 138.926,101.417 U1.22@139.503,99.775 ; 138.926,101.417 U1.22@139.18,99.696 ; 138.926,101.417 U1.22@139.503,99.775 ; 138.926,101.417 U1.22@139.18,99.696 ; 138.926,101.417 U1.22@139.503,99.775 ; 138.926,101.417 U1.22@139.18,99.696 ; 138.926,101.417 U1.22@139.503,99.775 ; 138.926,101.417 U1.22@139.18,99.696 ; P100.14@145.004,115.036 145.7,113.43 ; P100.14@145.004,115.036 145.7,113.43 ; P100.14@145.004,115.036 145.7,113.43 ; P100.14@145.004,115.036 145.7,113.43 ; P100.14@145.004,115.036 145.7,113.43 ; P100.14@145.004,115.036 145.7,113.43 ; P100.14@145.32,115.139 145.7,113.43 ; P100.14@145.32,115.139 145.7,113.43 ; P100.14@145.32,115.139 145.7,113.43 ; P100.14@145.32,115.139 145.7,113.43 ; P100.14@145.32,115.139 145.7,113.43 ; P100.14@145.32,115.139 145.7,113.43 ; P100.14@145.572,115.176 145.7,113.43 ; P100.14@145.572,115.176 145.7,113.43 ; P100.14@145.572,115.176 145.7,113.43 ; P100.14@145.572,115.176 145.7,113.43 ; P100.14@145.572,115.176 145.7,113.43 ; P100.14@145.572,115.176 145.7,113.43 ; P100.14@145.572,115.176 145.699,113.437 ; 145.7,113.43 P100.14@146.154,115.121 ; 145.7,113.43 P100.14@145.827,115.176 ; 145.7,113.43 P100.14@146.154,115.121 ; 145.7,113.43 P100.14@145.827,115.176 ; 145.7,113.43 P100.14@146.154,115.121 ; 145.7,113.43 P100.14@145.827,115.176 ; 145.7,113.43 P100.14@146.154,115.121 ; 145.7,113.43 P100.14@145.827,115.176 ; 145.7,113.43 P100.14@146.154,115.121 ; 145.7,113.43 P100.14@145.827,115.176 ; 145.7,113.43 P100.14@146.154,115.121 ; 145.7,113.43 P100.14@145.827,115.176 ; 145.699,113.437 P100.14@146.154,115.12 ; 145.699,113.437 P100.14@145.827,115.176
NetR7_1: R7.1 U3.1 | length 77.9
  Bottom Layer w0.5: U3.1@77.562,76.894 cw(c77.562,75.518) 78.535,76.491 cw(c79.508,77.464) U3.1@78.132,77.464 ; 79.466,75.56 ccw(c81.672,77.765) R7.1@81.672,74.646 ; 80.32,74.706 ccw(c81.672,76.058) R7.1@81.672,74.146 ; R7.1@81.026,74 U3.1@77.562,77.464 ; R7.1@81.332,73.732 79.581,75.588 ; R7.1@81.34,73.726 79.564,75.539 ; R7.1@81.346,73.721 79.427,75.601 ; R7.1@81.914,74.586 79.427,75.601 ; R7.1@81.916,74.585 79.564,75.539 ; R7.1@81.925,74.58 79.581,75.588 ; U3.1@77.204,77.02 79.443,75.583 ; U3.1@77.204,77.02 79.443,75.583 ; U3.1@77.204,77.02 79.443,75.583 ; U3.1@77.204,77.02 79.443,75.583 ; U3.1@77.562,77.464 79.443,75.583 ; U3.1@77.562,77.464 79.443,75.583 ; U3.1@78.006,77.822 79.443,75.583 ; U3.1@78.006,77.822 79.443,75.583 ; U3.1@78.006,77.822 79.443,75.583 ; U3.1@78.006,77.822 79.443,75.583 ; 79.33,75.696 81.344,73.723 79.33,75.696 ; 79.33,75.696 81.92,74.583 79.33,75.696 ; 79.33,75.696 R7.1@81.672,74.126 ; 79.33,75.696 R7.1@81.672,74.126 ; 79.427,75.601 R7.1@81.672,74.126 ; 79.564,75.539 R7.1@81.672,74.126 ; 79.581,75.588 R7.1@81.672,74.126